# Altium PCB Recovery.PcbDoc (part 2 of 3)
Units mil, origin at the board's own origin, x right, y up, seen from the top; angles counter-clockwise.
Board outline 11025 x 3525 mil, 2 copper layers (Top Layer, Bottom Layer), stack 65.792 mil thick; 249 components, 149 nets, 729 pads, 156 vias.
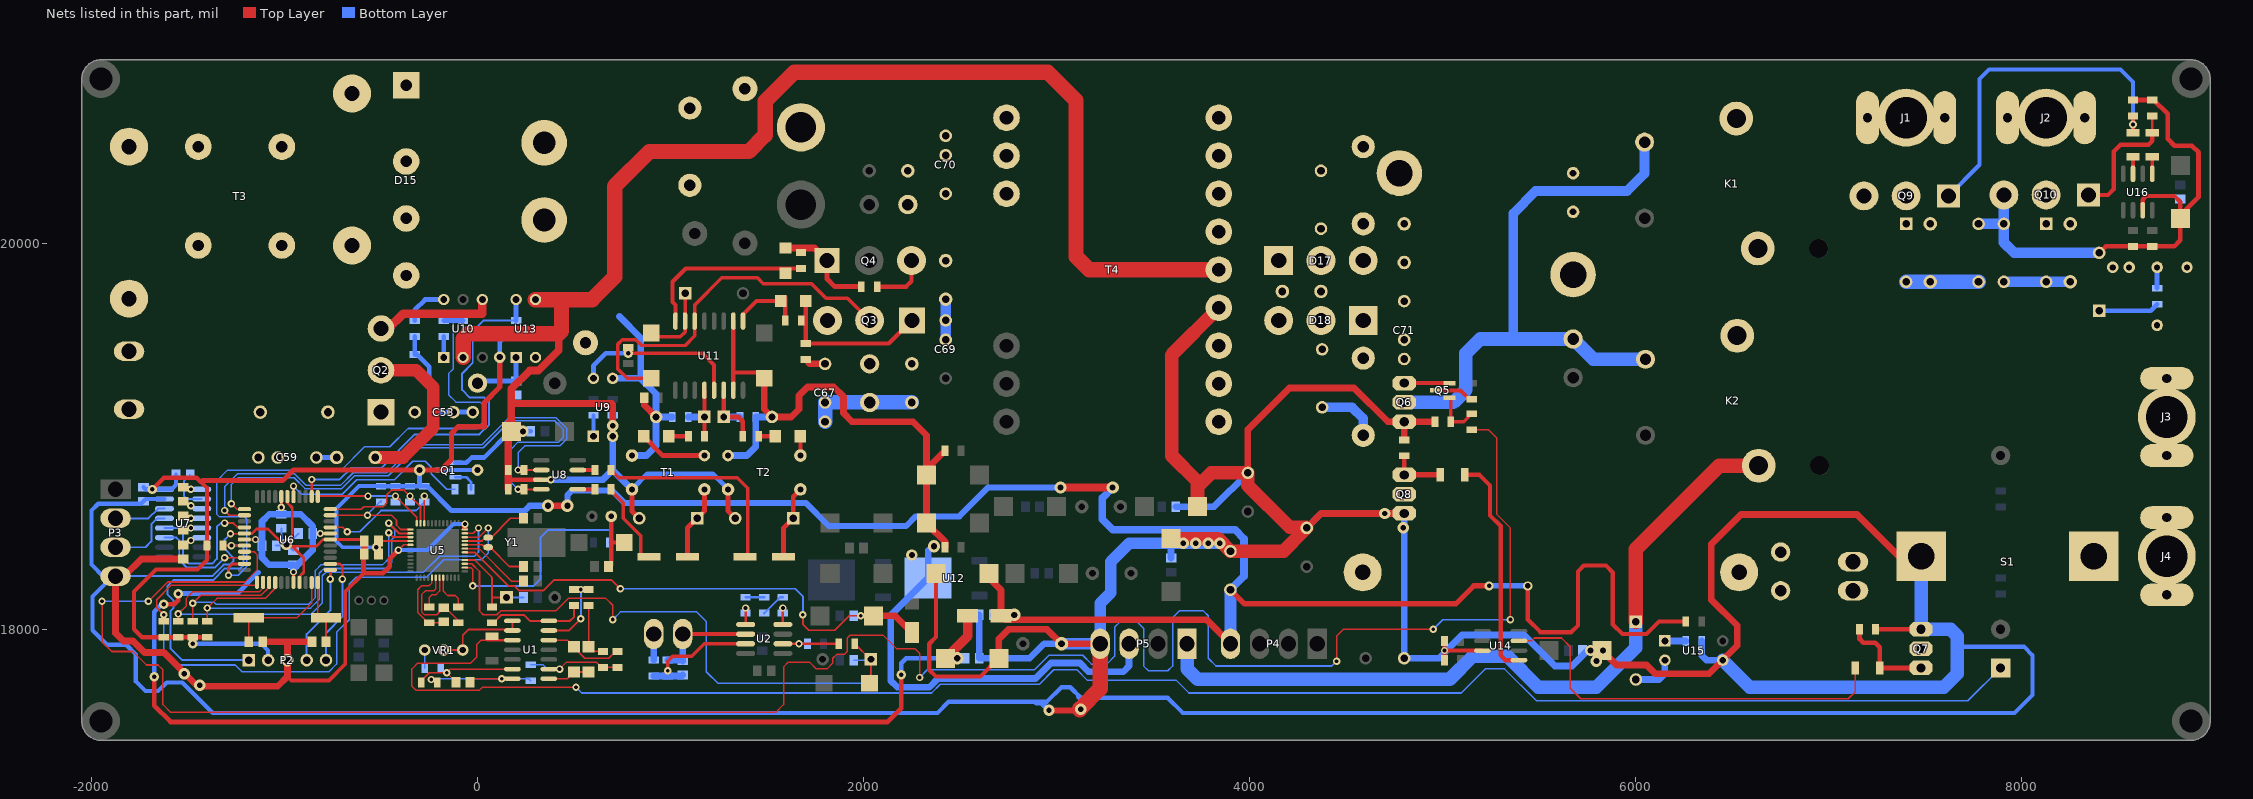
[diagram p2: the nets of this part, all layers, seen from the top]

## Via types
v1: diameter 38, hole 19.68, Top Layer to Bottom Layer, 89 vias
v2: diameter 62.99, hole 31.5, Top Layer to Bottom Layer, 14 vias
v3: diameter 59.06, hole 28, Top Layer to Bottom Layer, 12 vias
v4: diameter 59.06, hole 31.5, Top Layer to Bottom Layer, 9 vias
v5: diameter 60, hole 31.5, Top Layer to Bottom Layer, 9 vias
v6: diameter 50, hole 23.62, Top Layer to Bottom Layer, 7 vias
v7: diameter 50, hole 28, Top Layer to Bottom Layer, 4 vias
v8: diameter 47.24, hole 23.62, Top Layer to Bottom Layer, 3 vias
v9: diameter 55, hole 31.5, Top Layer to Bottom Layer, 2 vias
v10: diameter 47.24, hole 31.5, Top Layer to Bottom Layer, 1 vias
v11: diameter 47.24, hole 27.56, Top Layer to Bottom Layer, 1 vias
v12: diameter 42, hole 19.68, Top Layer to Bottom Layer, 1 vias
v13: diameter 59.06, hole 23.62, Top Layer to Bottom Layer, 1 vias
v14: diameter 40, hole 19.68, Top Layer to Bottom Layer, 1 vias
v15: diameter 66.93, hole 31.5, Top Layer to Bottom Layer, 1 vias
v16: diameter 59.06, hole 27.56, Top Layer to Bottom Layer, 1 vias

## Nets (pads, with @x,y where several pads share a name; then routed paths per layer and width w, separated by ;. In a path a pad name is that pad's centre, name@x,y a point inside that pad or via, vN(x,y) a via of type N, cw(c..) or ccw(c..) an arc to the next point about the centre after c; other vN are vias at no path point) (continued)
GND: C8.2 C9.1 C12.2 C13.1 C30.1 C32.2 C34.2 C35.1 C36.2 C37.2 C38.1 C39.2 C40.2 C41.2 C42.2 C43.2 C46.2 C48.1 C49.2 C50.2 C54.1 C55.2 C57.2 C58.2 C79.2 C81.2 C83.2 C84.2 C85.1 C86.1 D5.1 D6.1 D22.1 L3.1 P2.3 P3.4 P5.4 Q1.1 Q6.3 Q7.3 Q8.3 Q9.3 Q10.3 R31.2 R32.2 R33.2 R37.2 R60.1 R63.2 R65.1 R66.1 R69.1 R71.1 R73.1 R75.2 R76.2 R80.2 R81.2 S1.2 T1.2 T2.2 T4.6 U5.12 U5.29 U6.6 U6.16 U6.30 U6.39 U7.15 U8.3 U9.2 U10.2 U13.3 U14.3 U15.3 U16.3 | length 48894.6
  Top Layer w10: v1(-1280,18495) -1208.94,18495 U6.16@-1207.44,18496.5 ; v1(-410,18410) -382.2,18437.8 U5.29@-347.32,18437.8
  Top Layer w15: U6.16@-1207.44,18496.5 -1168.5,18496.5 -1145,18520 -1085,18520 v5@-995,18430 ; U6.6@-985,18687.44 -985,18655 -960,18630 -960,18465 v5@-995,18430 ; U6.30@-922.01,18242.56 -922.01,18272.99 -900,18295 -900,18370 -960,18430 ; C30.1@-586.42,18457.48 -593.94,18465 U6.39@-762.56,18465 -800,18465 -835,18430 -960,18430 ; v5@-995,18430 -960,18430
  Top Layer w20: -985,17755 -965,17735 -770,17735 -685,17820 -685,18195 -590,18290 ; C32.2@-590,18386.42 C32.2@-586.42,18390 ; R66.1@5008.66,17840 v1(5008.66,17890) ; R65.1@5008.66,17940 v1(5008.66,17890) ; U14.3@5205.51,17890 v1(5008.66,17890)
  Top Layer w22: 158.66,18775 U8.3@330.51,18775 ; C36.2@2375,18290 2375,17960 2340,17925 2340,17790 2375,17755 2605,17755 C39.2@2700,17850 ; D22.1@8400,19950 8433.66,19983.66 R75.2@8575,19983.66 R76.2@8675,19983.66 8788.66,19983.66 8820,20015 C84.2@8820,20127.5 8820,20145 8820,20215 8790,20245 8645,20245 8625,20225 U16.3@8625,20170.51
  Top Layer w25: C32.2@-590,18386.42 -590,18290 -490,18290 -455,18325 -455,18365 v1(-410,18410) ; T1.2@800,18725 800,18612.5 D5.1@837.5,18575 ; T2.2@1297.5,18725 1297.5,18612.5 D6.1@1335,18575 ; R69.1@7241.34,18000 Q7.3@7477.56,18000 ; R80.2@8575,20741.34 R81.2@8675,20741.34 8683.66,20741.34 8755,20670 8755,20540 8790,20505 8880,20505 8915,20470 8915,20240 C84.2@8820,20145
  Top Layer w30: -65.82,18525.76 v1@-65.82,18545 ; v3(2960,17580) 3120,17580 v3(3125,17585)
  Top Layer w35: C48.1@-1525,18363.58 -1741.42,18363.58 -1830,18275 P3.4@-1875,18275 -1875,17980 -1835,17940 -1785,17940 -1725,17880 -1625,17880 -1450,17705 -1035,17705 -985,17755 P2.3@-985,17840 -985,17935 ; C38.1@-1112.17,17935 C35.1@-857.83,17935 ; C32.2@-586.42,18390 C30.1@-586.42,18457.48 ; 175,19170 695,19170 700,19165 v3(700,19055) U9.2@700,19000 ; C39.2@2700,17850 2700,17950 2750,18000 2950,18000 L3.1@3025,17925 P5.4@3225,17925 ; C54.1@3990,18810 3990,19035 4205,19250 4540,19250 4715,19075 Q6.3@4800,19075 ; C57.2@4295,18525 4370,18600 v3(4700,18600) Q8.3@4800,18600 ; R71.1@4800,18981.34 Q6.3@4800,19075 ; R63.2@4958.66,19075 Q6.3@4800,19075 ; C81.2@5825,17890 5900,17815 6055,17815 6100,17770 6380,17770 U15.3@6450,17840 6525,17915 6525,18020 6390,18155 6390,18440 6545,18595 7145,18595 7361.26,18378.74 S1.2@7477.56,18378.74
  Top Layer w40: R31.2@158.66,18725 158.66,18775 R32.2@158.66,18825 158.66,19063.66 175,19080 ; C50.2@175,19025 175,19080 ; 420,19530 420,19445 315,19340 270,19340 175,19245 175,19170 175,19080
  Top Layer w70: C12.2@3592.5,18470 3720,18470 3835,18470 C58.2@3900,18405 4175,18405 C57.2@4277.5,18507.5 ; T4.6@3840,19665.75 3595,19420.75 3595,18900 3728.1,18766.9 3728.1,18636.9 C13.1@3730,18635 3730,18740 3800,18810 C54.1@3990,18810 3990,18745 4207.1,18527.9 4292.1,18527.9 C57.2@4295,18525
  Top Layer w80: U10.2@-75,19408.07 -75,19505 -50,19530 420,19530 435,19545 435,19708.07 ; U13.3@300,19708.07 435,19708.07 ; v3@3120,17582 3120,17587.83 3225,17692.83 P5.4@3225,17925 ; T4.6@3840,19862.6 3167.4,19862.6 3100,19930 3100,20740 2955,20885 1640,20885 1490,20735 1490,20560 1405,20475 890,20475 710,20295 710,19825 593.07,19708.07 435,19708.07
  Bottom Layer w10: P3.4@-1875,18275 -1375.46,18275 -1315.46,18335 -1282.73,18335 -1265,18352.73 -1265,18371.62 -1310,18416.62 -1310,18465 v1(-1280,18495) ; C40.2@-1043.07,18433.5 -989.92,18433.5 v5@-985,18438.43 ; C42.2@-1016.5,18523.07 -1016.5,18469.92 -988.29,18441.71 v5@-985,18438.43 ; C41.2@-953.5,18406.93 v5@-985,18438.43 ; C43.2@-926.93,18496.5 v5@-985,18438.43
  Bottom Layer w20: v1(-410,18410) -260,18410 -125,18545 v1(-65,18545)
  Bottom Layer w22: U7.15@-1621.46,18675 -1718.58,18675 C46.2@-1730,18663.58 -1743.58,18650 -1965,18650 -2000,18615 -2000,18335 -1940,18275 P3.4@-1875,18275 -1905,18245 -1920,18245 -1995,18170 -1995,17995 -1920,17920 -1820,17920 -1770,17870 -1770,17730 -1720,17680 -1655,17680 -1610,17725 -1530,17725 -1371.5,17566.5 2382.03,17566.5 2440.84,17625.31 2950.31,17625.31 3025,17700 3070,17700 3125,17645 3575,17645 3653.5,17566.5 7961.5,17566.5 8055,17660 8055,17865 8010,17910 7665,17910
  Bottom Layer w24: Q1.1@-114.57,18862.4 -57.6,18862.4 -30,18890 35,18890 170,19025 C49.2@276.08,19025
  Bottom Layer w25: U10.2@-75,19408.07 R37.2@-75,19516.73 ; T1.2@800,18725 880,18805 1217.5,18805 T2.2@1297.5,18725
  Bottom Layer w30: 2895,17621.31 2918.69,17621.31 v3(2960,17580) ; 3114.4,17651.91 3125,17641.31 v3(3125,17585)
  Bottom Layer w35: v1(380,18775) 650,18775 700,18825 ; R33.2@700,19108.66 v3(700,19055) U9.2@700,19000 700,18825 ; T1.2@800,18725 700,18825 ; C34.2@2598.92,18075 C37.2@2598.92,17850 2860,17850 2935,17925 L3.1@3025,17925 ; C8.2@3592.5,18368.92 3592.5,18442.5 3595,18445 ; C9.1@3616.42,18635 3815,18635 C54.1@3990,18810 ; C57.2@4295,18525 4370,18600 v3(4700,18600) Q8.3@4800,18600 C55.2@4800,17850 4980,17850 5100,17970 5420,17970 5580,17810 5670,17810 5750,17890 v9(5765,17890) ; R73.1@6341.34,17940 6341.34,17863.66 6365,17840 U15.3@6450,17840
  Bottom Layer w55: C85.1@7775,20100 C86.1@7906.1,20100 ; Q10.3@7906.1,20250 C86.1@7906.1,20100 ; D22.1@8400,19950 7960,19950 7906.1,20003.9 C86.1@7906.1,20100
  Bottom Layer w60: L3.1@3025,17925 P5.4@3225,17925 3225,18135 3280,18190 3280,18350 3375,18445 3595,18445 v3(3655,18445) v3(3720,18445) v3(3785,18445) v3(3845,18445) 3860,18445 C58.2@3900,18405
  Bottom Layer w70: U15.3@6450,17840 6590,17700 7595,17700 7665,17770 7665,17910 7665,17965 7630,18000 Q7.3@7477.56,18000 S1.2@7477.56,18378.74
  other v3: -1440,17710 -1520,17770 4795,18525
  other v4: 5795,17835 5830,17890 235,19025 8470,19875 8555,19875 8855,19875
  other v5: -990,18440
HVDC: R55.2 U6.2 U13.4 | length 2086.1
  Top Layer w15: U6.2@-859.02,18687.44 v1@-859.02,18770.98
  Bottom Layer w10: v1(-859.02,18775.98) -714.02,18775.98 -655,18835 -500,18835 -325,19010 10,19010 60,19060 60,19175 35,19200 -40,19200 -80,19240 -80,19325 -25,19380 -25,19545 29.41,19599.41 R55.2@200,19599.41
  Bottom Layer w25: R55.2@200,19599.41 U13.4@200,19708.07
MID: C65.2 C70.1 D14.2 Q3.2 Q4.3 R51.2 R52.1 R54.1 T4.1 U11.6 | length 2275.7
  Top Layer w18: C65.2@900,19300 775,19300 725,19350 725,19475 750,19500 820,19500 850,19470 1075,19470 1125,19520 U11.6@1125,19596.63 1125,19680 1265,19820 1450,19820 1480,19790 1730,19790 1805,19715 1916.1,19715 Q3.2@2031.1,19600
  Top Layer w22: R51.2@2070.24,19775 2220,19775 2247.8,19802.8 Q4.3@2247.8,19910
NetB1_2: B1.2 D20.1 Q7.2
NetBT1_2: J4.1 S1.1
NetC1_1: C1.1 P1.2 R4.1 U2.2 | length 544.2
  Top Layer w22: P1.2@1062.5,17975 U2.2@1388.54,17975
  Bottom Layer w35: R4.1@985,17841.34 1057.58,17841.34 C1.1@1062.5,17836.42 P1.2@1062.5,17975
NetC1_2: C1.2 R2.2 R4.2 U2.3 | length 642.9
  Top Layer w18: v1(985,17785) 985,17835 1010,17860 1110,17860 1175,17925 U2.3@1388.54,17925
  Bottom Layer w35: R2.2@912.5,17758.66 R4.2@985,17758.66 1057.58,17758.66 C1.2@1062.5,17763.58
NetC2_1: C2.1 R6.1 R9.2 U1.7 | length 742.3
  Top Layer w8: C2.1@-38.58,17725 -19.69,17743.9 v1(125,17743.9) U1.7@180.51,17743.9
  Bottom Layer w8: v1@-236.1,17743.9 v1(125,17743.9) 264.76,17743.9 R9.2@275,17733.66
  other v1: -240,17740
NetC2_2: C2.2 R3.1 R6.2 U1.6 | length 547.9
  Top Layer w8: R6.2@-291.34,17725 -291.34,17733.66 -250,17775 v1(-160,17775) ; C2.2@-130,17745 v1(-160,17775) ; U1.6@180.51,17793.9 -141.1,17793.9 v1(-160,17775)
NetC11_1: C11.1 C14.1 D3.2 R13.2 U5.3 | length 3202.9
  Top Layer w8: U5.3@-65.82,18339.37 -30,18339.37 10,18299.37 10,18095 30,18075 100,18075 120,18095 405,18095 470,18160 665,18160 700,18125 v1(700,18050) ; R13.2@1953.84,17925 2037.5,17841.34 2037.5,17727.5 C14.1@2030,17720
  Bottom Layer w8: v1(700,18050) 740,18090 1135,18090 1185,18040 1185,17780 1245,17720 1990,17720 2037.5,17767.5 2037.5,17840 C11.1@1948.92,17840
NetC15_1: C15.1 C18.1 R15.2 R16.1 U5.2 | length 1554.1
  Top Layer w8: U5.2@-65.82,18319.69 -34.69,18319.69 -25,18310 v1(-25,18225)
  Top Layer w22: C18.1@692.5,18332.5 692.5,18455 ; R15.2@692.5,18585 692.5,18455 ; C15.1@760,18450 697.5,18450 692.5,18455
  Bottom Layer w10: v1(-25,18225) 290,18225 325,18260 325,18475 365,18515 692.5,18515 ; R16.1@683.84,18450 692.5,18458.66 692.5,18515 ; R15.2@692.5,18585 692.5,18515
NetC22_1: C22.1 D4.2 R18.1 U5.4 | length 495
  Top Layer w9: U5.4@-65.82,18359.06 -14.06,18359.06 75,18270 75,18165 ; R18.1@75,18116.34 75,18165 ; D4.2@150,18165 75,18165
  Bottom Layer w10: D4.2@150,18165 C22.1@238.58,18165
NetC23_1: C23.1 R19.1 U5.41 | length 392.8
  Top Layer w8: U5.41@-236.1,18267.52 -236.1,18240 -251.1,18225 -290,18225 -310,18205 -310,18087.37 -256.29,18033.66 -253.46,18033.66 R19.1@-250,18033.66 -179.92,18033.66 C23.1@-175,18038.58
NetC23_2: C23.2 R20.1 U5.42 | length 484.5
  Top Layer w8: U5.42@-216.41,18267.52 -216.41,18208.59 -225,18200 -270,18200 -290,18180 -290,18090 -275,18075 -211.42,18075 C23.2@-175,18111.42 -166.42,18111.42 -100,18045 R20.1@-100,18033.66
NetC24_1: C24.1 U5.8 Y1.1 | length 351.1
  Top Layer w9: U5.8@-65.82,18437.8 25,18437.8 37.8,18425 Y1.1@55,18425 65,18425 165,18325 C24.1@238.58,18325
NetC27_2: C27.2 U5.7 | length 374
  Top Layer w8: U5.7@-65.82,18418.11 6.89,18418.11 175,18250 C27.2@238.58,18250
NetC28_1: C28.1 U5.9 Y1.2 | length 338.1
  Top Layer w9: U5.9@-65.82,18457.48 22.48,18457.48 40,18475 Y1.2@55,18475 ; Y1.2@70,18475 170,18575 C28.1@238.58,18575
NetC29_1: C29.1 C31.1 L4.2 U5.6 | length 2710.4
  Top Layer w10: U5.6@-65.82,18398.43 -13.43,18398.43 160,18225 190,18225 215,18200 340,18200 395,18255 695,18255 v1(740,18210) ; v1(1685,18075) 1685,18025 1715,17995 1850,17995 1925,18070 v1(1985,18070) C31.1@2050,18070
  Top Layer w35: C31.1@2050,18070 2163.39,18070 L4.2@2250,17983.39
  Bottom Layer w10: v1(740,18210) 1645,18210 1685,18170 v1(1685,18075) ; C29.1@1955,18070 v1(1985,18070)
NetC35_2: C35.2 U6.33 Y2.1 | length 302.6
  Top Layer w8: Y2.1@-827.52,18065 U6.33@-827.52,18242.56 ; C35.2@-785,17935 Y2.1@-785,18060
NetC37_1: C37.1 C39.1 C40.1 C41.1 C42.1 C43.1 L5.2 U6.7 U6.17 U6.29 U6.40 | length 7036.1
  Top Layer w15: U6.17@-1207.44,18465 v1(-1150,18465) ; v1(-1016.5,18631.5) U6.7@-1016.5,18687.44 ; U6.29@-953.5,18242.56 v1(-953.5,18296.5) ; v1(-815,18496.5) U6.40@-762.56,18496.5
  Top Layer w25: v6(-1675,17755) -1675,17605 -1590,17520 2125,17520 2195,17590 v6(2195,17765) ; v6(-1625,18130) -1570,18130 -1550,18150 v6(-1550,18185)
  Top Layer w50: C39.1@2425,17850 2538.39,17963.39 L5.2@2538.39,18070
  Bottom Layer w25: v6(-1675,17755) -1675,18090 v6@-1630,18135 ; v6(-1550,18185) -1245,18185 -1135,18295 ; v6(2195,17765) 2195,17825 2220,17850 v2@2490,17850
  Bottom Layer w35: v1(-953.5,18296.5) -953.5,18311.5 -854.09,18410.91 C43.1@-854.09,18496.5 -854.09,18534.09 -915.91,18595.91 C42.1@-1016.5,18595.91 -1079.09,18595.91 -1115.91,18559.09 C40.1@-1115.91,18433.5 -1115.91,18370.91 -1079.09,18334.09 C41.1@-953.5,18334.09
  other v2: 2485,17850
NetC38_2: C38.2 U6.32 Y2.2 | length 589
  Top Layer w8: C38.2@-1185,17935 Y2.2@-1185,18060 -935,18060 -859.02,18135.98 U6.32@-859.02,18242.56
NetC44_1: C44.1 U7.1
  other v1: -1485,18725
NetC44_2: C44.2 U7.3
  other v1: -1485,18640
NetC45_1: C45.1 U7.4
  other v1: -1485,18575
NetC45_2: C45.2 U7.5
  other v1: -1485,18525
NetC47_2: C47.2 U7.2 | length 220.7
  Bottom Layer w10: C47.2@-1488.58,18800 -1520,18768.58 -1520,18690 -1505,18675 U7.2@-1428.54,18675
NetC48_2: C48.2 U7.6
  other v1: -1485,18460
NetC51_1: C51.1 R34.1 | length 413.6
  Top Layer w18: R34.1@691.34,18725 691.34,18718.66 755,18655 755,18575 845,18485 C51.1@845,18375
NetC51_2: C51.2 D5.2 T1.1 | length 386.2
  Top Layer w25: C51.2@1087.5,18375 1087.5,18525 D5.2@1137.5,18575 1175,18612.5 T1.1@1175,18725
NetC52_1: C52.1 R35.1 | length 1103
  Top Layer w18: R35.1@691.34,18825 731.34,18785 1345,18785 1400,18730 C52.1@1400,18375
NetC52_2: C52.2 D6.2 T2.1 | length 386.2
  Top Layer w25: C52.2@1585,18375 1585,18525 D6.2@1635,18575 1635,18579.55 1635,18687.5 T2.1@1672.5,18725
NetC53_1: C53.1 C59.2 JP1.3 Q2.1 R46.2
NetC53_2: C53.2 R44.1 R45.2 | length 624.8
  Bottom Layer w25: R44.1@-325,19516.73 R45.2@-325,19424.21 -314.21,19424.21 -250,19360 -250,19175 -200,19125 C53.2@-125,19125 C53.2@-25,19125
NetC59_1: C59.1 R47.2 | length 105
  Bottom Layer w25: C59.1@-835,18890 R47.2@-730,18890
NetC62_1: C62.1 Q2.2 R45.1 R47.1 T3.3 | length 881.3
  Top Layer w65: R47.1@-530,18890 -385,18890 -228.5,19046.5 -228.5,19253.5 -316.54,19341.54 Q2.2@-500,19341.54
NetC62_2: C62.2 JP1.1 R46.1 T3.1
NetC65_1: C65.1 D11.2 U11.7 | length 370.4
  Top Layer w18: C65.1@915,19515 1050,19515 1075,19540 U11.7@1075,19596.63 D11.2@1075,19740
NetC67_2: C67.2 D14.1 R52.2 | length 550
  Bottom Layer w75: C67.2@1800,19075 C67.2@1800,19175 D14.1@2031.1,19175 R52.2@2250,19175
NetC68_1: C68.1 D15.2 T3.4
NetC68_2: C68.2 D15.4 T3.2
NetC69_2: C69.2 R54.2 | length 210
  Bottom Layer w55: C69.2@2425,19500 C69.2@2425,19600 R54.2@2425,19710
NetC70_2: C70.2 D16.1 R53.2
NetC71_1: C71.1 R56.1
NetC71_2: C71.2 D18.1 D18.3 R58.1 T4.5
NetC72_1: C72.1 C73.1 C75.2 D17.2 D18.2 L6.1 R60.2
NetC72_2: C72.2 R58.2 | length 323.9
  Bottom Layer w50: C72.2@4375,19150 4530,19150 4587.8,19092.2 R58.2@4587.8,19005
NetC73_2: C73.2 R57.2
NetC74_1: C74.1 C76.1 D15.3 F2.2 R59.1
NetC78_1: C78.1 R61.2 U13.1 | length 326.4
  Bottom Layer w25: R61.2@0,19275 11.42,19286.42 C78.1@200,19286.42 U13.1@200,19408.07
NetC85_2: C85.2 D23.1 R82.1 | length 375
  Bottom Layer w75: D23.1@7400,19800 R82.1@7525,19800 C85.2@7775,19800
NetC86_2: C86.2 D24.1 R83.1 | length 343.9
  Bottom Layer w55: C86.2@7906.1,19800 D24.1@8125,19800 R83.1@8250,19800
NetD1_1: D1.1 R10.1 R14.2 | length 299.6
  Top Layer w8: R14.2@575,18123.66 D1.1@575,17908.9 598.66,17885.24 R10.1@650,17885.24
NetD1_2: D1.2 D2.1 U1.8 | length 220
  Top Layer w8: U1.8@369.49,17743.9 465,17743.9 D2.1@500,17778.9 D1.2@575,17778.9
NetD2_2: D2.2 R11.1 U1.12 | length 411.3
  Top Layer w8: U1.12@369.49,17943.9 465,17943.9 D2.2@500,17908.9 500,17905 555,17850 680,17850 715.24,17885.24 R11.1@725,17885.24
NetD7_1: D7.1 T1.3 | length 356.4
  Top Layer w25: D7.1@860,19000 960,18900 T1.3@1175,18900
NetD7_2: D7.2 R39.2 | length 102.3
  Top Layer w22: D7.2@990,19000 R39.2@1092.32,19000
NetD8_1: D8.1 T2.3 | length 100
  Top Layer w22: T2.3@1672.5,18900 D8.1@1672.5,19000
NetD8_2: D8.2 R40.2 | length 86.2
  Top Layer w22: R40.2@1456.34,19000 D8.2@1542.5,19000
NetD9_2: D9.2 R39.1 R41.1 U11.12 | length 322
  Top Layer w22: R39.1@1175,19000 D9.2@1175,19100 U11.12@1175,19238.37
  Bottom Layer w35: R41.1@1091.34,19100 D9.2@1175,19100
NetD10_2: D10.2 R40.1 R42.1 U11.14 | length 406.8
  Top Layer w22: D10.2@1275,19100 U11.14@1275,19238.37
  Top Layer w25: D10.2@1275,19100 1350,19100 1373.66,19076.34 R40.1@1373.66,19000
  Bottom Layer w35: D10.2@1275,19100 R42.1@1358.66,19100
NetD12_1: D12.1 Q4.1 R48.1 R51.1 | length 531.1
  Top Layer w25: Q4.1@1810,19910 1810,19815 1850,19775 R51.1@1987.56,19775
  Top Layer w35: D12.1@1595,19975 1745,19975 Q4.1@1810,19910
NetD12_2: D12.2 R48.2 U11.8 | length 903
  Top Layer w22: U11.8@1025,19596.63 1025,19680 1010,19695 1010,19800 1078.66,19868.66 R48.2@1675,19868.66
NetD13_1: D13.1 Q3.1 R49.1 R50.1 | length 829.7
  Top Layer w22: D13.1@1700,19710 D13.1@1700,19700 R50.1@1700,19480 2130,19480 Q3.1@2250,19600
NetD13_2: D13.2 R49.2 U11.1 | length 377.4
  Top Layer w22: U11.1@1375,19596.63 1375,19630 1445,19700 D13.2@1570,19700 ; R49.2@1593.66,19600 D13.2@1593.66,19720
NetD17_1: D17.1 D17.3 R56.2 R57.1 T4.8
NetD19_1: D19.1 K1.2 K2.2 Q6.2 | length 3120.9
  Bottom Layer w50: 5365,19503.7 5365,20155 5480,20270 5955,20270 6045,20360 K1.2@6045,20523.7
  Bottom Layer w70: Q6.2@4800,19175 5055,19175 5120,19240 5120,19430 5193.7,19503.7 5365,19503.7 D19.1@5675,19503.7 5780,19398.7 K2.2@6050,19398.7
NetD21_1: D21.1 U15.2 | length 232.4
  Bottom Layer w35: D21.1@6000,17740 6120,17740 6150,17770 U15.2@6150,17840
NetD22_2: D22.2 R74.2 | length 313.9
  Bottom Layer w25: D22.2@8400,19650 8666.34,19650 R74.2@8700,19683.66
NetD23_2: D23.2 J1.1 Q9.2 R82.2
NetD24_2: D24.2 J2.1 Q10.2 R83.2
NetLS1_1: LS1.1 Q1.3 | length 185.4
  Bottom Layer w22: Q1.3@-185.43,18825 LS1.1@0,18825
NetLS2_2: LS2.2 R74.1 | length 108.7
  Bottom Layer w25: R74.1@8700,19766.34 LS2.2@8700,19875
NetP1_1: P1.1 R2.1 | length 133.7
  Bottom Layer w35: R2.1@912.5,17841.34 P1.1@912.5,17975
NetP2_1: P2.1 R29.2 U6.18 | length 1480.4
  Top Layer w10: R29.2@-1318.66,18433.5 v1(-1275,18433.5) U6.18@-1207.44,18433.5
  Bottom Layer w10: v1(-1275,18433.5) -1221.5,18433.5 -1212,18424.01 -1212,18333 -1230,18315 -1310,18315 -1370,18255 -1575,18255 -1605,18225 -1605,18180 -1575,18150 -1575,18110 -1590,18095 -1590,17900 -1530,17840 P2.1@-1185,17840
NetP2_4: P2.4 U6.34 | length 518.2
  Top Layer w15: v1(-762.56,18260) U6.34@-762.56,18307.52
  Bottom Layer w10: P2.4@-885,17840 -885,17975 -762.56,18097.44 v1(-762.56,18260)
NetP2_5: P2.5 U6.35 | length 573.6
  Top Layer w12: U6.35@-762.56,18339.02 -714.02,18339.02 -700,18325 v1@-700,18275
  Bottom Layer w10: P2.5@-785,17840 -785,17980 -700,18065 v1(-700,18260)
NetP3_2: P3.2 U7.14 | length 274.3
  Bottom Layer w10: P3.2@-1850,18575 -1705,18575 -1655,18625 U7.14@-1621.46,18625
  Bottom Layer w12: P3.2@-1875,18575 P3.2@-1850,18575
NetP3_3: P3.3 U7.13 | length 368.4
  Bottom Layer w10: P3.3@-1875,18425 -1720,18425 -1690,18455 -1690,18545 -1660,18575 U7.13@-1621.46,18575
NetQ1_2: Q1.2 R30.1 | length 129.5
  Bottom Layer w15: Q1.2@-114.57,18787.6 -57.6,18787.6 -33.66,18763.66 R30.1@-33.66,18725
NetQ2_3: Q2.3 U10.4 | length 629.9
  Top Layer w45: Q2.3@-500,19558.07 -461.93,19558.07 -385,19635 25,19635 U10.4@25,19708.07
NetQ5_1: Q5.1 R62.2 R63.1 | length 245.1
  Top Layer w20: Q5.1@5041.34,19194.29 R63.1@5041.34,19075 5108.66,19075 R62.2@5150,19116.34
NetQ5_2: Q5.2 Q6.1 | length 235.4
  Top Layer w20: Q6.1@4800,19275 Q5.2@5035.43,19275
NetQ5_3: Q5.3 R64.2 | length 204.4
  Top Layer w20: Q5.3@4964.57,19237.6 5092.4,19237.6 5138.27,19191.73 R64.2@5150,19191.73
NetQ7_1: Q7.1 R67.2 R69.2 | length 493.7
  Top Layer w25: R69.2@7158.66,18000 7158.66,17950 7178.66,17930 7240,17930 7262.99,17907.01 7262.99,17877.01 R67.2@7262.99,17800 Q7.1@7477.56,17800
NetQ8_1: Q8.1 R68.2 R71.2 | length 285.7
  Top Layer w22: Q8.1@4800,18800 R71.2@4800,18898.66
  Top Layer w28: Q8.1@4800,18800 R68.2@4987.01,18800
NetQ8_2: Q8.2 R72.1
NetQ9_1: Q9.1 R78.2 R80.1 | length 1820
  Top Layer w22: R78.2@8575,20572.99 v12(8575,20615) R80.1@8575,20658.66
  Bottom Layer w22: Q9.1@7618.9,20245 7780,20406.1 7780,20850 7830,20900 8510,20900 8575,20835 v12(8575,20615)
NetQ10_1: Q10.1 R79.2 R81.1 | length 690
  Top Layer w15: R79.2@8675,20572.99 R81.1@8675,20658.66
  Top Layer w22: Q10.1@8343.9,20250 8445,20250 8475,20280 8475,20475 8510,20510 8655,20510 8675,20530 R79.2@8675,20572.99
NetR1_2: R1.2 S1.5 U1.3 | length 9256.7
  Top Layer w8: R1.2@50,17943.9 18.9,17943.9 -5,17920 -5,17855 -35,17825 -310,17825 -340,17795 -340,17705 -320,17685 10,17685 25,17700 v1(510,17700)
  Top Layer w12: R1.2@50,17943.9 U1.3@180.51,17943.9
  Bottom Layer w8: v1(510,17700) 540,17670 2351.72,17670 2397.22,17715.5 2910.5,17715.5 2985,17790 3105,17790 3160,17735 3620,17735 3685,17670 5095,17670 5220,17795 5320,17795 5485,17630 7719.57,17630 S1.5@7889.57,17800
NetR3_2: R3.2 VR1.3 | length 92.5
  Bottom Layer w10: R3.2@-273.43,17800 VR1.3@-273.43,17892.5
NetR5_1: R5.1 R7.2 | length 96.5
  Bottom Layer w12: R7.2@1388.54,18166.34 R5.1@1485,18166.34
NetR5_2: R5.2 R8.1 | length 130.7
  Bottom Layer w12: R5.2@1485,18083.66 1567.68,18166.34 R8.1@1581.46,18166.34
NetR7_1: R7.1 U2.1 | length 85
  Top Layer w12: U2.1@1388.54,18025 v1(1388.54,18110)
NetR8_2: R8.2 U2.8 | length 85
  Top Layer w12: U2.8@1581.46,18025 v1(1581.46,18110)
NetR9_1: R9.1 R10.2 R11.2 U1.9 | length 541.1
  Top Layer w8: U1.9@369.49,17793.9 v1(425,17793.9) 461.1,17830 615,17830 642.44,17802.56 R10.2@650,17802.56 R11.2@725,17802.56
  Bottom Layer w8: R9.1@275,17816.34 338.66,17816.34 361.1,17793.9 v1(425,17793.9)
NetR12_1: R12.1 R13.1 U2.6 | length 333.4
  Top Layer w15: U2.6@1581.46,17925 R13.1@1871.16,17925
  Bottom Layer w15: v1(1665,17925) R12.1@1708.66,17925
NetR14_1: R14.1 R17.2 U1.13 | length 417.2
  Top Layer w10: U1.13@369.49,17993.9 473.9,17993.9 v1(535,18055) ; R17.2@500,18206.34 v1(535,18206.34) R14.1@575,18206.34
  Bottom Layer w10: v1(535,18055) v1(535,18206.34)
NetR17_1: R17.1 R18.2 U1.14 | length 522.4
  Top Layer w10: R18.2@75,18033.66 82.7,18033.66 124.04,18075 240,18075 271.1,18043.9 U1.14@369.49,18043.9 478.9,18043.9 500,18065 R17.1@500,18123.66
NetR19_2: R19.2 U5.43 | length 185
  Top Layer w8: R19.2@-250,18116.34 -250,18165 -235,18180 -215,18180 -196.73,18198.27 U5.43@-196.73,18267.52
NetR20_2: R20.2 U5.44 | length 206.5
  Top Layer w8: U5.44@-177.04,18267.52 -177.04,18197.04 -155,18175 -115,18175 -100,18160 R20.2@-100,18116.34
NetR21_1: R21.1 U5.22 U6.41 | length 701.2
  Top Layer w9: U6.41@-762.56,18527.99 -697.99,18527.99 v1(-675,18505) ; U5.22@-275.47,18549.02 v1(-275.47,18690)
  Bottom Layer w9: v1(-675,18505) -610,18505 -500,18615 -319.13,18615 R21.1@-275.47,18658.66
NetR22_1: R22.1 U5.23 U6.44 | length 654.6
  Top Layer w9: U6.44@-762.56,18622.48 -602.52,18622.48 -590,18635 -490,18635 -470,18655 -470,18696.5 -445,18721.5 -381.5,18721.5 v1(-350,18690) -295.15,18635.15 U5.23@-295.15,18549.02
NetR23_1: R23.1 U5.24 U6.1 | length 589.1
  Top Layer w9: U6.1@-827.52,18690 v1(-567.44,18690) ; v1(-425,18690) -314.84,18579.84 U5.24@-314.84,18549.02
  Bottom Layer w9: v1(-567.44,18690) v1(-425,18690)
NetR24_1: R24.1 U5.25 U6.43 | length 569.6
  Top Layer w9: U6.43@-762.56,18590.98 -445.99,18590.99 -420,18565 -420,18540 -396.54,18516.54 U5.25@-347.32,18516.54
  Bottom Layer w9: v1@-572.5,18592.5 -500,18665 R24.1@-500,18658.66
  other v1: -570,18590.98
NetR25_1: R25.1 U5.26 U6.26 | length 1984.1
  Top Layer w8: R25.1@-1400,18041.34 v1(-1400,18110) -1350,18160 -1100,18160 -1047.99,18212.01 U6.26@-1047.99,18242.56
  Top Layer w10: v1(-460,18550) -406.85,18496.85 U5.26@-347.32,18496.85
  Bottom Layer w8: v1(-1400,18110) -865,18110 -820,18155 -820,18290 -795,18315 -475,18315 -444,18346 -444,18465 -429,18480 -429,18518.84 -460,18549.84 v1(-460,18550)
NetR26_1: R26.1 U5.27 U6.25 | length 2006.6
  Top Layer w8: R26.1@-1475,18041.34 v1(-1475,18135) -1434,18176 -1121.64,18176 -1079.49,18218.15 U6.25@-1079.49,18242.56
  Top Layer w10: v1(-460,18500) -437.17,18477.17 U5.27@-347.32,18477.17
  Bottom Layer w8: v1(-1475,18135) -1469,18141 -1366,18141 -1355,18130 -875,18130 -840,18165 -840,18305 -810,18335 -490,18335 -460,18365 v1(-460,18500)
NetR27_1: R27.1 U5.11 U6.24 | length 2563.6
  Top Layer w8: R27.1@-1550,18041.34 v1(-1550,18080) -1510,18120 -1510,18160 -1475,18195 -1130,18195 -1110.98,18214.02 U6.24@-1110.98,18242.56
  Top Layer w9: U5.11@-65.82,18496.85 -23.15,18496.85 v1(5,18525)
  Bottom Layer w8: v1(-1550,18080) -1549,18079 -861,18079 -804,18136 -804,18277 -785.5,18295.5 -279.5,18295.5 -196.07,18378.93 -16.07,18378.93 5,18400 v1(5,18525)
NetR28_1: R28.1 U5.10 U6.23 | length 3299.3
  Top Layer w8: v1(-1625,18075) -1662,18112 -1662,18153 -1587.44,18227.56 U6.23@-1142.48,18227.56 ; U5.10@-65.82,18477.17 7.17,18477.17 v1(55,18525)
  Bottom Layer w8: v1(-1625,18075) -1625,17865 -1575,17815 -1255,17815 -1220,17780 -770,17780 -730,17820 -730,17985 -665,18050 -665,18235 -630,18270 -265,18270 -175,18360 20,18360 55,18395 v1(55,18525)
NetR30_2: R30.2 U6.5 | length 1059.4
  Top Layer w9: U6.5@-953.5,18687.44 v1(-953.5,18741.5)
  Bottom Layer w9: v1(-953.5,18741.5) -912.01,18700 -700,18700 -625,18775 -430,18775 -335,18870 -270,18870 -240,18840 -240,18805 -160,18725 R30.2@-116.34,18725
NetR34_2: R34.2 U8.5 | length 89.2
  Top Layer w20: U8.5@519.49,18725 R34.2@608.66,18725
NetR35_2: R35.2 U8.7 | length 89.2
  Top Layer w20: U8.7@519.49,18825 R35.2@608.66,18825
NetR36_1: R36.1 U9.1 | length 108.7
  Bottom Layer w20: U9.1@600,19000 R36.1@600,19108.66
NetR38_1: R38.1 U10.1 | length 108.7
  Bottom Layer w25: U10.1@-175,19408.07 R38.1@-175,19516.73
NetR43_2: R43.2 U9.4 U11.13 | length 873.4
  Top Layer w20: v6(780,19430) 1165,19430 1225,19370 U11.13@1225,19238.37
  Bottom Layer w25: U9.4@600,19300 600,19365 665,19430 v6(780,19430)
NetR44_2: R44.2 U10.6 | length 227.6
  Bottom Layer w25: R44.2@-325,19599.41 -325,19655 -271.93,19708.07 U10.6@-175,19708.07
NetR67_1: R67.1 U14.7 | length 2143.5
  Top Layer w8: U14.7@5394.49,17940 5460,17940 5475,17955 5615,17955 5660,17910 5660,17695 5715,17640 7100,17640 7137.01,17677.01 R67.1@7137.01,17800
NetR68_1: R68.1 U14.5 | length 1162.4
  Top Layer w22: R68.1@5112.99,18800 5190,18800 5245,18745 5245,18590 5300,18535 5300,17865 5325,17840 U14.5@5394.49,17840
NetR73_2: R73.2 U15.1 | length 108.7
  Bottom Layer w35: U15.1@6150,17940 R73.2@6258.66,17940
NetR78_1: R78.1 U16.7 | length 87.5
  Top Layer w20: U16.7@8575,20359.49 R78.1@8575,20447.01
NetR79_1: R79.1 U16.5 | length 87.5
  Top Layer w20: U16.5@8675,20359.49 R79.1@8675,20447.01
NetU1_1: U1.1 U1.2 VR1.1 VR1.2 | length 595.5
  Top Layer w10: VR1.2@-175,17892.5 VR1.1@-76.57,17892.5 -76.57,17968.43 -45,18000 174.41,18000 U1.2@180.51,17993.9 U1.1@180.51,18043.9
  Bottom Layer w10: VR1.2@-175,17892.5 VR1.1@-76.57,17892.5
NetU6_15: U6.15 U7.12 | length 772.5
  Top Layer w10: v1@-1310,18555 v1(-1310,18550) -1265,18550 -1242.99,18527.99 U6.15@-1207.44,18527.99
  Bottom Layer w10: U7.12@-1621.46,18525 -1545,18525 -1525,18505 -1525,18370 -1495,18340 -1375,18340 -1350,18365 -1350,18530 -1330,18550 v1(-1310,18550) v1@-1310,18555
NetU6_20: U6.20 U7.11 | length 557.7
  Top Layer w10: v1(-1310,18370.51) U6.20@-1207.44,18370.51
  Bottom Layer w10: U7.11@-1621.46,18475 -1560,18475 -1545,18460 -1545,18360 -1505,18320 -1360.51,18320 v1(-1310,18370.51)
ONAC: R37.1 R38.2 U6.21 | length 3126.2
  Top Layer w15: v1(-1290,18280) -1290,18320 -1270.98,18339.02 U6.21@-1207.44,18339.02
  Bottom Layer w8: v1(-1290,18280) -1240,18280 -1195,18325 -1195,18570 -1209,18584 -1339,18584 -1350,18595 -1350,18770 -1295,18825 -705,18825 -585,18945 -455,18945 -360,19040 -5,19040 39.5,19084.5 39.5,19150.5 13,19177 -112,19177 -150,19215 -150,19325 -125,19350 -125,19599.41
  Bottom Layer w25: R38.2@-175,19599.41 -125,19599.41 R37.1@-75,19599.41
ONDC: R62.1 U6.19 | length 11593.3
  Top Layer w8: v1(-1945,18145) -1945,17935 -1895,17885 -1785,17885 -1715,17815 -1655,17815 -1630,17790 -1630,17610 -1589.5,17569.5 1544.5,17569.5 1585,17610 1585,17805 1610,17830 1720,17830 1755,17795 1810,17795 1840,17825 1840,17850 1860,17870 1900,17870 1915,17885 1915,17955 1930,17970 2100,17970 2170,17900 2265,17900 2290,17875 v1(2290,17750) ; v1(-1705,18145) -1605,18245 -1205,18245 -1140,18310 -1140,18385 -1157.01,18402.01 U6.19@-1207.44,18402.01 ; v1(4450,17835) 4450,17965 4485,18000 v1(4950,18000) ; R62.1@5150,19033.66 5236.34,19033.66 5280,18990 5280,18595 5350,18525 v1(5350,18050)
  Bottom Layer w8: v1(-1945,18145) v1(-1705,18145) ; v1(2290,17750) 2330,17790 2885,17790 2960,17865 3135,17865 3180,17820 3260,17820 3300,17860 3300,18010 3330,18040 3415,18040 3450,18005 3450,17810 3475,17785 3575,17785 3600,17810 3600,18060 3635,18095 3760,18095 3785,18070 3785,17850 3825,17810 4425,17810 v1(4450,17835) ; v1(4950,18000) 5000,18050 v1(5350,18050)
PGND: C56.2 C60.2 C61.2 C63.2 C64.2 C66.2 C67.1 C74.2 C77.2 C78.2 D9.1 D10.1 D15.1 P5.3 Q3.3 R41.2 R42.2 R50.2 R59.2 T1.4 T2.4 U9.3 U11.2 U11.15 U12.2 U13.2 | length 6521.8
  Top Layer w22: U11.15@1325,19238.37 1325,19330 ; U11.2@1325,19596.63 1325,19330 ; C64.2@1485,19300 1455,19330 1325,19330
  Top Layer w35: C60.2@863.58,19200 863.58,19161.42 D9.1@925,19100 ; C64.2@1485,19300 1485,19140 D10.1@1525,19100 1625,19100 1665,19140 1665,19210 1710,19255 1845,19255 1895,19205 1895,19120 1940,19075 2255,19075 2325,19005 C56.2@2325,18828.84 ; R50.2@1700,19397.32 1722.32,19375 C67.1@1800,19375 ; C66.2@2421.16,18425 2421.16,18453.84 2334.25,18540.75 C63.2@2325,18550 C56.2@2325,18800 C56.2@2325,18828.84 ; C61.2@2421.16,18925 C56.2@2325,18828.84
  Bottom Layer w35: U9.3@700,19300 845,19300 ; 735,19620 845,19510 845,19300 ; T1.4@800,18900 875,18900 925,18950 D9.1@925,19100 ; R41.2@1008.66,19100 D9.1@925,19100 ; T2.4@1297.5,18900 1395,18900 1441.34,18946.34 R42.2@1441.34,19100 D10.1@1525,19100 ; 2334.25,18409.25 U12.2@2334.25,18265.04 2140,18070.79 2140,17735 2175,17700 2340,17700 2385,17745 2890,17745 2970,17825 3120,17825 3165,17780 3345,17780 3375,17810 P5.3@3375,17925 ; 845,19300 925,19220 D9.1@925,19100
  other v2: 2365,18430
  other v4: 2250,18385
PWM1H: R31.1 U6.12 U8.4 | length 2751.7
  Top Layer w8: v1(-1275,18650) -1247.48,18622.48 U6.12@-1207.44,18622.48
  Top Layer w10: R31.1@241.34,18725 U8.4@330.51,18725
  Bottom Layer w8: v1(-1275,18650) -1275,18750 -1240,18785 -950,18785 -893.98,18728.98 -839.55,18728.98 ; -839.53,18729 -703.37,18729 -637.37,18795 -462.37,18795 -317.37,18940 30,18940 170,19080 400,19080 445,19035 445,18995 420,18970 210,18970 172,18932 172,18763 v1(210,18725)
PWM1L: R32.1 U6.13 U8.2 | length 2744
  Top Layer w8: v1(-1310,18615) -1285.98,18590.98 U6.13@-1207.44,18590.98
  Top Layer w10: R32.1@241.34,18825 U8.2@330.51,18825
  Bottom Layer w8: v1(-1310,18615) -1310,18740 -1245,18805 -947.37,18805 -887.36,18744.98 -846.18,18744.98 -710,18745 -644,18811 -469,18811 -324,18956 23.37,18956 163.37,19096 406.63,19096 461,19041.63 461,18985 426,18950 245,18950 210,18915 v1(210,18825)
VBAT: D21.2 J3.1 K1.4 K2.4 LS2.1 P5.1 | length 4004.3
  Top Layer w75: D21.2@6000,18040 6000,18415 6432.52,18847.52 K2.4@6636.46,18847.52
  Bottom Layer w70: P5.1@3675,17925 3675,17795 3730,17740 5035,17740 5155,17860 5335,17860 5495,17700 5795,17700 6000,17905 D21.2@6000,18040
VCC: C30.2 C32.1 C34.1 C36.1 C46.1 C47.1 C58.1 L5.1 LS1.2 P2.2 P4.4 R21.2 R22.2 R23.2 R24.2 R25.2 R26.2 R27.2 R28.2 R29.1 R55.1 R77.2 U5.28 U7.16 | length 16131.7
  Top Layer w10: C30.2@-513.58,18457.48 U5.28@-347.32,18457.48
  Top Layer w21.65: v11@5440,18220 5440,18050 5505,17985 5665,17985 5700,18020 5700,18300 5730,18330 5845,18330 5880,18295 5880,18025 5930,17975 6055,17975 6120,18040 R77.2@6258.66,18040
  Top Layer w22: v8(-1685,18725) -1625,18785 -1455,18785 -1401.34,18731.34 R29.1@-1401.34,18433.5 -1401.34,18358.66 -1450,18310 -1665,18310 -1780,18195 -1780,18000 -1738.66,17958.66 R28.2@-1625,17958.66 ; C32.1@-513.58,18390 C30.2@-513.58,18457.48
  Top Layer w25: R28.2@-1625,17958.66 R27.2@-1550,17958.66 R26.2@-1475,17958.66 R25.2@-1400,17958.66 ; -1425,18770 -1010,18770 -955,18825 LS1.2@-300,18825
  Top Layer w27.56: LS1.2@-300,18825 -190,18825 -135,18880 -135,19015 -100,19050 35,19050 35,19175 115,19255 v5(115,19410) ; C58.1@3900,18205 3973.11,18131.89 5066.89,18131.89 5160,18225 v8(5240,18225)
  Top Layer w31.5: v2(365,18640) v2(465,18640)
  Top Layer w35: C36.1@2650,18290 2650,18265 2711.61,18203.39 L5.1@2711.61,18070 2731.61,18050 3775,18050 P4.4@3900,17925
  Top Layer w40: v2(3020,18735) v2(3290,18735)
  Top Layer w60: C36.1@2650,18290 C36.1@2655,18285
  Bottom Layer w20: v8(-523.58,18425) -700,18425 -730,18455 -730,18625 -613.66,18741.34 R24.2@-500,18741.34
  Bottom Layer w22: C46.1@-1730,18736.42 -1718.58,18725 v8(-1685,18725) U7.16@-1621.46,18725 -1585,18725 -1561.42,18748.58 C47.1@-1561.42,18800 ; v6(-1475,17925) -1120,17925 -1085,17890 P2.2@-1085,17840
  Bottom Layer w25: R24.2@-500,18741.34 R23.2@-425,18741.34 R22.2@-350,18741.34 R21.2@-300,18741.34 ; LS1.2@-300,18825 R21.2@-300,18741.34 ; v5(115,19410) 115,19490 141.73,19516.73 R55.1@200,19516.73 ; 245,18615 -135,18615 -261.34,18741.34 R21.2@-275.47,18741.34 R21.2@-300,18741.34 ; v2@3287.5,18737.5 v2@3290,18740
  Bottom Layer w27.56: v8(5240,18225) v11(5440,18225)
  Bottom Layer w31.5: 245,18615 270,18640 v2(365,18640) ; v2(465,18640) 465,18695 490,18720 695,18720 760,18655 1700,18655 1820,18535 2220,18535 2270,18585 2495,18585 2645,18735 v2(3020,18735)
  Bottom Layer w35: C34.1@2671.75,18075 v2(2780,18075)
  Bottom Layer w39.37: v2(3290,18735) 3235,18680 3235,18570 3290,18515 3925,18515 3970,18470 3970,18275 C58.1@3900,18205
  Bottom Layer w60: P4.4@3900,17925 C58.1@3900,18205
WORK: B1.1 C75.1 D20.2 K1.3 K2.3 L6.2 R72.2
pads on no net: K1.5 K2.5 U5.13 U5.14 U5.15 U5.16 U5.17 U5.18 U5.19 U5.20 U5.21 U6.3 U6.4 U6.8 U6.9 U6.14 U6.22 U6.31 U6.36 U6.37 U7.7 U7.8 U7.9 U7.10 U8.1 U8.8 U10.3 U10.5 U11.4 U11.5 U11.9 U11.10 U11.16 U14.1 U14.8 U16.1 U16.8

## Polygon pours and split planes (outlines as drawn)
VBAT on Top Layer "Top Layer-No Net" (solid, remove dead copper, pour order 94): 7885,19155 8265,18775 8850,18775 8910,18835 8910,19710 8835,19785 8040,19785 7885,19630
NetBT1_2 on Top Layer "Top Layer-No Net" (solid, remove dead copper, pour order 91): 8215,18110 8275,18050 8840,18050 8910,18120 8910,18620 8845,18685 8285,18685 8215,18615
+12V on Top Layer "Top Layer-No Net" (solid, remove dead copper, pour order 88): 20 vertices, not listed, extent 5340,17580 8145,17950
+AVDD on Top Layer "Top Layer-No Net" (solid, remove dead copper, pour order 85): 21 vertices, not listed, extent 4570,17435 8320,17985
GND on Top Layer "Top Layer-No Net" (solid, remove dead copper, pour order 81): 51 vertices, not listed, extent 8330,19800 8960,20790
+12V on Top Layer "Top Layer-No Net" (solid, remove dead copper, pour order 79): 45 vertices, not listed, extent 7815,17610 8870,20455
NetQ8_2 on Top Layer "VBAT" (solid, remove dead copper, pour order 56): 17 vertices, not listed, extent 4475,18200 5125,18740
NetD24_2 on Top Layer "VBAT" (solid, remove dead copper, pour order 103): 8025,20070 8025,20300 7825,20500 7825,20815 7880,20870 8385,20870 8445,20810 8445,20515 8225,20295 8225,20190 8290,20125 8290,20065 8260,20035 8060,20035
NetD23_2 on Top Layer "VBAT" (solid, remove dead copper, pour order 101): 7300,20070 7300,20300 7100,20500 7100,20815 7155,20870 7660,20870 7720,20810 7720,20515 7500,20295 7500,20190 7565,20125 7565,20065 7535,20035 7335,20035
NetC62_2 on Top Layer "NetC62_2" (solid, remove dead copper, pour order 77): -1450,20140 -1370,20060 -1370,19360 -1215,19205 -1085,19205 -1050,19170 -1050,19085 -1085,19050 -1530,19050 -1760,19280 -1955,19280 -2000,19325 -2000,20105 -1965,20140
NetC53_1 on Top Layer "NetC53_1" (solid, remove dead copper, pour order 58): 17 vertices, not listed, extent -2000,18805 -290,19250
NetC68_1 on Top Layer "NetC68_1" (solid, remove dead copper, pour order 71): 18 vertices, not listed, extent -1125,20300 -250,20900
NetC68_2 on Top Layer "NetC68_2" (solid, remove dead copper, pour order 82): -1100,19925 -1025,19850 -545,19850 -280,20115 -280,20230 -325,20275 -1000,20275 -1100,20175
NetD17_1 on Top Layer "VBAT" (solid, remove dead copper, pour order 59): 25 vertices, not listed, extent 3715,19825 4845,20565
GND on Top Layer "Top Layer-No Net" (solid, remove dead copper, pour order 108): 17 vertices, not listed, extent 2975,17675 8105,20935
+12V on Top Layer "Top Layer-No Net" (solid, remove dead copper, pour order 111): 21 vertices, not listed, extent 3320,18130 4340,18400
NetC62_1 on Top Layer "NetC62_1" (solid, remove dead copper, pour order 65): 33 vertices, not listed, extent -2000,18855 -190,20635
VCC on Top Layer "Top Layer-No Net" (solid, remove dead copper, pour order 115): -1500,18795 -1401.34,18696.34 -1401.34,18660 -1401.34,18668.66 -1360,18710 -1305,18765 -1275,18765 -1010,18765 -960,18815 -980,18795 -1140,18795 -1495,18795 -1500,18790
+BOOST on Top Layer "Top Layer-No Net" (solid, remove dead copper, pour order 121): 62 vertices, not listed, extent 1255,18110 3525,19790
PGND on Top Layer "Top Layer-No Net" (solid, remove dead copper, pour order 125): 1660,19438.66 1660,19330 1850,19330 1860,19340 1860,19395 1860,19400 1835,19425 1821.34,19438.66 1660,19438.66
PGND on Top Layer "Top Layer-No Net" (solid, remove dead copper, pour order 127): 18 vertices, not listed, extent 1090,18315 2495,19650
+AVDD on Top Layer "Top Layer-No Net" (solid, remove dead copper, pour order 131): 3669.09,18153.49 3702.58,18120 4270,18120 4465,18120 4510,18165 4510,18235 4510,18245 4450,18305 4445,18310 4100,18310 3725,18310 3670,18255 3669.09,18254.09 3669.09,18153.49
+AVDD on Top Layer "Top Layer-No Net" (solid, remove dead copper, pour order 137): 17 vertices, not listed, extent 2725,18055 3415,18550
AGND on Top Layer "Top Layer-No Net" (solid, remove dead copper, pour order 139): 2655,18710 2655,18470 2655,18305 2720,18240 2730,18230 2785,18230 2895,18230 2915,18250 2920,18255 2920,18315 2920,18625 2845,18700 2835,18710 2655,18710
VCC on Top Layer "Top Layer-No Net" (solid, remove dead copper, pour order 141): 18 vertices, not listed, extent 2600,17815 4000,18350
NetC37_1 on Top Layer "Top Layer-No Net" (solid, remove dead copper, pour order 145): 19 vertices, not listed, extent 2375,17795 2605,18110
AGND on Top Layer "Top Layer-No Net" (solid, remove dead copper, pour order 151): 20 vertices, not listed, extent 1695,18010 1955,18615
AGND on Top Layer "Top Layer-No Net" (solid, remove dead copper, pour order 153): 19 vertices, not listed, extent 1730,17655 1905,17810
AGND on Top Layer "Top Layer-No Net" (solid, remove dead copper, pour order 155): 21 vertices, not listed, extent 1465,17750 1835,17905
AGND on Top Layer "Top Layer-No Net" (solid, remove dead copper, pour order 157): 22 vertices, not listed, extent 105,18200 650,18625
AGND on Top Layer "Top Layer-No Net" (solid, remove dead copper, pour order 159): 25,17910 25,17825 50,17800 65,17785 240,17785 385,17785 425,17825 425,17860 425,17880 400,17905 385,17920 85,17920 35,17920 25,17910
AGND on Top Layer "Top Layer-No Net" (solid, remove dead copper, pour order 161): 20 vertices, not listed, extent -1630,17569.5 -375,17905
-AVEE on Top Layer "Top Layer-No Net" (solid, remove dead copper, pour order 171): 26 vertices, not listed, extent 615,17655 1485,18530
+5VA on Top Layer "Top Layer-No Net" (solid, remove dead copper, pour order 173): 1985,18540 1930,18485 1930,18370 1930,18180 2005,18105 2045,18065 2270,18065 2315,18065 2350,18100 2350,18180 2350,18210 2300,18260 2020,18540 1985,18540
+12V on Top Layer "Top Layer-No Net" (solid, remove dead copper, pour order 177): 345,19125 1420,19125 1540,19005 1540,18130 1420,18010 1185,18010 1110,18085 1110,18730 1070,18770 1010,18710 410,18710 315,18805 315,19095
+AVDD on Top Layer "Top Layer-No Net" (solid, remove dead copper, pour order 181): 27 vertices, not listed, extent 1425,17940 2180,18675
+VLO on Top Layer "Top Layer-No Net" (solid, remove dead copper, pour order 183): 50 vertices, not listed, extent 745,18120 2725,19465
AGND on Bottom Layer "Top Layer-No Net" (solid, remove dead copper, pour order 75): 29 vertices, not listed, extent -1645,17410 8210,18650
+AVDD on Bottom Layer "Top Layer-No Net" (solid, remove dead copper, pour order 72): 28 vertices, not listed, extent 7770,17805 8270,19000
GND on Bottom Layer "Top Layer-No Net" (solid, remove dead copper, pour order 69): 74 vertices, not listed, extent -2050,17465 8090,18980
+12V on Bottom Layer "Top Layer-No Net" (solid, remove dead copper, pour order 63): 20 vertices, not listed, extent 5135,17855 6095,19365
NetD19_1 on Bottom Layer "Top Layer-No Net" (solid, remove dead copper, pour order 60): 25 vertices, not listed, extent 4715,19130 6180,20675
NetC72_2 on Bottom Layer "Top Layer-No Net" (solid, remove dead copper, pour order 57): 21 vertices, not listed, extent 4340,18940 4655,19185
NetC71_2 on Bottom Layer "GMID" (solid, remove dead copper, pour order 98): 25 vertices, not listed, extent 3720,18980 4850,19700
NetC53_1 on Bottom Layer "NetC53_1" (solid, remove dead copper, pour order 55): 17 vertices, not listed, extent -2000,18850 -290,19250
NetC62_2 on Bottom Layer "NetC62_2" (solid, remove dead copper, pour order 74): -1450,20140 -1370,20060 -1370,19360 -1245,19235 -1085,19235 -1050,19200 -1050,19085 -1085,19050 -1530,19050 -1760,19280 -1955,19280 -2000,19325 -2000,20105 -1965,20140
GND on Bottom Layer "VBAT" (solid, remove dead copper, pour order 83): 31 vertices, not listed, extent 2490,19480 8935,20945
VBAT on Bottom Layer "VBAT" (solid, remove dead copper, pour order 107): 8850,18775 8260,18775 8040,18995 6950,18995 6855,18900 6835,18900 6830,18905 6830,19930 7240,19520 8460,19520 8555,19615 8850,19615 8900,19565 8900,18825
NetD17_1 on Bottom Layer "VBAT" (solid, remove dead copper, pour order 104): 3765,20170 3905,20170 3980,20095 3980,19855 4020,19815 4220,19815 4275,19870 4275,20200 4325,20250 4325,20680 4280,20725 3805,20725 3710,20630 3710,20225
WORK on Bottom Layer "WORK" (solid, remove dead copper, pour order 99): 23 vertices, not listed, extent 5495,19395 6665,20740
NetB1_2 on Bottom Layer "VBAT" (solid, remove dead copper, pour order 78): 17 vertices, not listed, extent 6685,17860 7540,18260
NetC71_1 on Bottom Layer "VBAT" (solid, remove dead copper, pour order 73): 4740,19925 4740,19765 4740,19675 4765,19650 4770,19645 4810,19645 4840,19645 4860,19665 4860,19790 4860,19930 4840,19950 4775,19950 4765,19950 4740,19925
NetD17_1 on Bottom Layer "VBAT" (solid, remove dead copper, pour order 67): 21 vertices, not listed, extent 4485,19825 4860,20180
WORK on Bottom Layer "VBAT" (solid, remove dead copper, pour order 61): 19 vertices, not listed, extent 6070,18175 7220,19545
NetD24_2 on Bottom Layer "VBAT" (solid, remove dead copper, pour order 102): 8025,20070 8025,20300 7825,20500 7825,20815 7880,20870 8385,20870 8445,20810 8445,20515 8225,20295 8225,20190 8290,20125 8290,20065 8260,20035 8060,20035
NetD23_2 on Bottom Layer "VBAT" (solid, remove dead copper, pour order 100): 7300,20070 7300,20300 7100,20500 7100,20815 7155,20870 7660,20870 7720,20810 7720,20515 7500,20295 7500,20190 7565,20125 7565,20065 7535,20035 7335,20035
NetC62_1 on Bottom Layer "NetC62_1" (solid, remove dead copper, pour order 62): 22 vertices, not listed, extent -2000,19250 -300,20635
NetC74_1 on Bottom Layer "NetC68_1" (solid, remove dead copper, pour order 84): -490,20690 -450,20650 -285,20650 -220,20585 -220,20400 -160,20340 905,20340 1020,20455 1765,20455 1830,20520 1830,20860 1765,20925 -450,20925 -490,20885
PGND on Bottom Layer "PGND" (solid, remove dead copper, pour order 86): 27 vertices, not listed, extent -510,19170 745,20340
NetC70_2 on Bottom Layer "NetC70_2" (solid, remove dead copper, pour order 87): 2170,20145 2275,20145 2300,20170 2300,20285 2340,20325 2540,20325 2575,20360 2575,20605 2530,20650 2275,20650 2145,20520 2145,20170
MID on Bottom Layer "MID" (solid, remove dead copper, pour order 89): 31 vertices, not listed, extent 1930,19300 2875,20755
NetC69_2 on Bottom Layer "NetC70_2" (solid, remove dead copper, pour order 90): 17 vertices, not listed, extent 2365,19460 2485,19750
+DCBUS on Bottom Layer "+DCBUS" (solid, remove dead copper, pour order 92): 1885,20050 1925,20010 1925,19880 1970,19835 2075,19835 2125,19885 2125,20415 2080,20460 1820,20460 1775,20415 1595,20415 1545,20365 1545,20150 1645,20050
PGND on Bottom Layer "PGND" (solid, remove dead copper, pour order 93): 39 vertices, not listed, extent 678.75,19325 1900,20425
NetC73_2 on Bottom Layer "GMID" (solid, remove dead copper, pour order 97): 19 vertices, not listed, extent 4320,20335 4675,20585
NetBT1_2 on Bottom Layer "VBAT" (solid, remove dead copper, pour order 105): 8175,18600 8250,18675 8785,18675 8850,18675 8900,18625 8900,18590 8900,18100 8850,18050 8770,18050 8225,18050 8175,18100
VBAT on Bottom Layer "VBAT" (solid, remove dead copper, pour order 106): 6505,19850 6660,19695 6660,19440 6475,19255 6475,18745 6530,18690 6785,18690 6855,18760 6855,20055 6820,20090 6545,20090 6500,20045 6505,20040
PGND on Bottom Layer "VBAT" (solid, remove dead copper, pour order 64): 23 vertices, not listed, extent 575,18855 1600,19730
NetC72_1 on Bottom Layer "GMID" (solid, remove dead copper, pour order 96): 17 vertices, not listed, extent 4275,19400 5730,20550
NetC68_1 on Bottom Layer "NetC68_1" (solid, remove dead copper, pour order 68): 18 vertices, not listed, extent -1125,20300 -250,20900
NetC68_2 on Bottom Layer "VBAT" (solid, remove dead copper, pour order 70): -1100,20380 -450,20380 -380,20380 -215,20215 -220,20210 -220,20075 -220,20050 -435,19835 -450,19820 -1010,19820 -1040,19820 -1100,19880
GND on Bottom Layer "VBAT" (solid, remove dead copper, pour order 76): -1080,18530 -1080,18540 -1065,18555 -1060,18560 -1005,18560 -930,18560 -900,18530 -890,18520 -890,18460 -890,18420 -930,18380 -940,18370 -1000,18370 -1055,18370 -1080,18395
NetC37_1 on Bottom Layer "VBAT" (solid, remove dead copper, pour order 80): 18 vertices, not listed, extent -1175,18275 -795,18650
GND on Bottom Layer "Top Layer-No Net" (solid, remove dead copper, pour order 66): 18 vertices, not listed, extent 2874.78,17755 5960,19615
+12V on Bottom Layer "Top Layer-No Net" (solid, remove dead copper, pour order 113): 3365,18250 3510,18250 3605,18250 3620,18265 3620,18320 3610,18330 3390,18330 3360,18330 3345,18315 3345,18280 3345,18265 3360,18250
VCC on Bottom Layer "Top Layer-No Net" (solid, remove dead copper, pour order 117): 17 vertices, not listed, extent -765,18395 3125,18870
GMID on Bottom Layer "GMID" (solid, remove dead copper, pour order 95): 23 vertices, not listed, extent 900,18565 2845,20145
PGND on Bottom Layer "Top Layer-No Net" (solid, remove dead copper, pour order 129): 49 vertices, not listed, extent 2050,17620 3450,18495
+AVDD on Bottom Layer "Top Layer-No Net" (solid, remove dead copper, pour order 133): 4260,18220 4260,18050 4360,17950 4411.21,17898.79 4653.72,17898.79 4673.79,17898.79 4695,17920 4705,17930 4705,17955 4705,18150 4650,18205 4635,18220 4260,18220
+AVDD on Bottom Layer "Top Layer-No Net" (solid, remove dead copper, pour order 135): 28 vertices, not listed, extent 3315,18080 3770,18265
NetC37_1 on Bottom Layer "Top Layer-No Net" (solid, remove dead copper, pour order 147): 22 vertices, not listed, extent 2152.53,17705 2555,17905
NetC37_1 on Bottom Layer "Top Layer-No Net" (solid, remove dead copper, pour order 149): -1175,18320 -1260,18235 -1420,18235 -1550,18235 -1575,18210 -1575,18175 -1575,18170 -1560,18155 -1546,18141 -1450,18141 -1079,18141 -940,18280 -920,18300 -920,18320
AGND on Bottom Layer "Top Layer-No Net" (solid, remove dead copper, pour order 163): 33 vertices, not listed, extent 2770,17880 2985,18675
AGND on Bottom Layer "Top Layer-No Net" (solid, remove dead copper, pour order 165): 38 vertices, not listed, extent -1245,17634 2050,18500
-AVEE on Bottom Layer "Top Layer-No Net" (solid, remove dead copper, pour order 167): 45 vertices, not listed, extent 1144.96,18170 5830,18980
-AVEE on Bottom Layer "Top Layer-No Net" (solid, remove dead copper, pour order 169): 25 vertices, not listed, extent 370,17710 725,17955
+5VA on Bottom Layer "Top Layer-No Net" (solid, remove dead copper, pour order 175): 20 vertices, not listed, extent -565,17635 2165,18270
+AVDD on Bottom Layer "Top Layer-No Net" (solid, remove dead copper, pour order 185): 1950,18475 1950,18335 2010,18275 2040,18245 2245,18245 2640,18245 2880,18485 2860,18505 2860,18550 2755,18550 2720,18585 2710,18575 1985,18575 1985,18510 1950,18475
GND on Bottom Layer "Top Layer-No Net" (solid, remove dead copper, pour order 187): -2035,19525 -1590,19970 4635,19970 7735,19970 8025,19680 8180,19525 8180,17725 8095,17725 7885,17515 7810,17440 -1590,17440 -1615,17440 -1850,17675 -2035,17860 -2035,19525